# EAGLE board mmc2120mg (EAGLE 5.11)
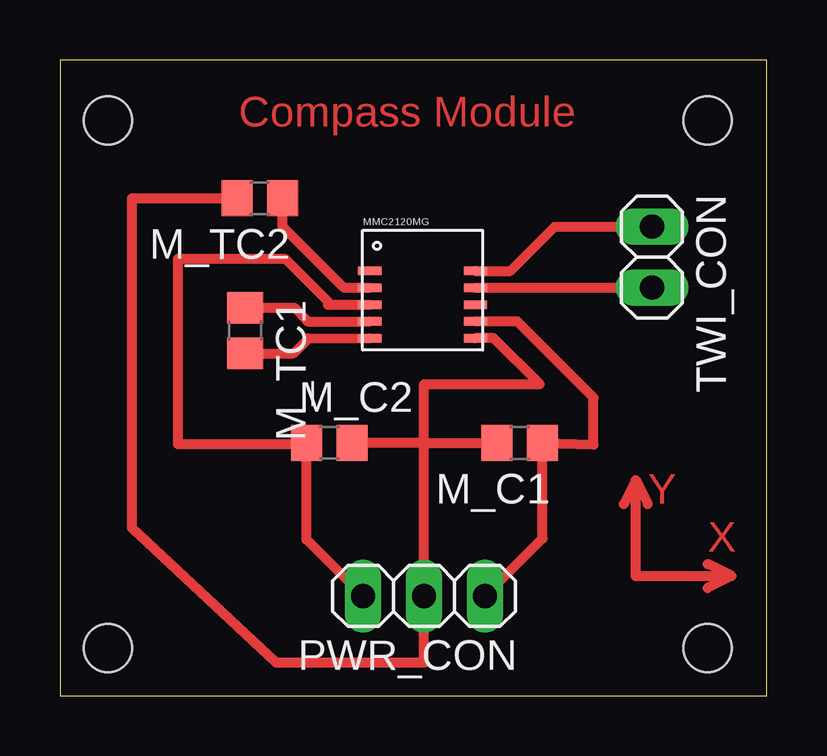
[diagram p0: board, top side]

Size 29.47 x 26.52 mm. Coordinates in mm from the lower left corner, seen from the top.
Outline: 0,0 29.47,0 29.47,26.52 0,26.52 0,0
Copper layers (1*16): Top 0.035mm / dielectric 1.5mm / Bottom 0.035mm
Design rules "default": minimum track width 10mil, minimum drill 24mil, track to track 8mil, track to pad 8mil, pad to pad 8mil, via to via 8mil, smd to smd 8mil, copper to edge 40mil, drill to drill 8mil, minimum pad ring 10mil, minimum via ring 8mil, stop-mask expansion 4mil, vias tented up to drill 0mil, thermal gap 10mil
Net classes: 0 default: width 0.406 mm, drill 1.27 mm, clearance 0.178 mm; 1 GND: width 0.406 mm, drill 1.27 mm, clearance 0.178 mm; 2 Analog: width 0.406 mm, drill 1.27 mm, clearance 0.178 mm; 3 power: width 0.406 mm, drill 1.27 mm, clearance 0.178 mm
Holes 2 mm at 2,24 27,24 27,2 2,2

## Footprints (pad centres in the part's own frame; a part is rotated, then mirrored left to right if it is on the bottom)
C0805 = smd 1.3 x 1.5: 1 -0.95,0; 2 0.95,0
LGA10 = smd 1 x 0.35: 1TEST -2,1; 2CAP -2,0.3; 3VDA -2,-0.4; 4C+ -2,-1.1; 5C- -2,-1.8; 6GND 2.4,-1.8; 7VDD 2.4,-1.1; 8FM 2.4,-0.4; 9SCL 2.4,0.3; 10SDA 2.4,1
1X03 = drill 1.016 long: 1 -2.54,0; 2 0,0; 3 2.54,0
1X02 = drill 1.016 long: 1 -1.27,0; 2 1.27,0

## Placement (x,y rotation side)
M_C1  100nF  [C0805]  19.17,10.55 180 top
M_C2  100nF  [C0805]  11.23,10.56 0 top
M_TC1  1µF  [C0805]  7.72,15.24 270 top
M_TC2  10µF  [C0805]  8.33,20.76 180 top
MMC2120MG  MMC  [LGA10]  14.92,16.72 0 top
PWR_CON  PWR_CON  [1X03]  15.18,4.17 180 top
TWI_CON  TWI_CON  [1X02]  24.68,18.3 270 top

## Library data of the parts
M_C1 M_C2 M_TC1 M_TC2 = rcl
MMC2120MG = lcc8
PWR_CON TWI_CON = pinhead

## Nets
GND [GND]: M_C1.2 M_C2.2 M_TC2.2 MMC2120MG.6GND PWR_CON.2
N$1: M_TC1.1 MMC2120MG.4C+
N$5: M_TC1.2 MMC2120MG.5C-
N$6: M_TC2.1 MMC2120MG.2CAP
SCL: MMC2120MG.9SCL TWI_CON.2
SDA: MMC2120MG.10SDA TWI_CON.1
VDA [power]: M_C2.1 MMC2120MG.3VDA PWR_CON.3
VDD [power]: M_C1.1 MMC2120MG.7VDD PWR_CON.1

## Tracks (layer width: path | path; a pad name or v marks a point on that pad's centre or on a via)
GND
  Top 0.406: 15.18,10.55 PWR_CON.2 15.18,1.4 9,1.4 3,7 3,20.76 M_TC2.2 | 15.18,10.55 M_C1.2 | M_C2.2 15.18,10.55 | MMC2120MG.6GND 18.08,14.92 20,13 15.18,13 15.18,10.55
N$1
  Top 0.406: MMC2120MG.4C+ 10.34,15.62 arc-90 10.3,15.66 9.77,16.19 M_TC1.1
N$3
  Top 0.406: 24,9 24,5 28,5 | 24,9 23.5,8 | 24,9 24.5,8 | 28,5 27,5.5 | 28,5 27,4.5
N$5
  Top 0.406: MMC2120MG.5C- 10.36,14.91 9.74,14.29 M_TC1.2
N$6
  Top 0.406: MMC2120MG.2CAP 11.85,17.02 11.85,17.01 9.28,19.58 M_TC2.1
SCL
  Top 0.406: TWI_CON.2 MMC2120MG.9SCL
SDA
  Top 0.406: MMC2120MG.10SDA 18.78,17.72 20.63,19.57 TWI_CON.1
VDA
  Top 0.406: MMC2120MG.3VDA 11.17,16.32 11.17,16.44 9.38,18.23 4.92,18.23 4.92,10.49 10.28,10.49 M_C2.1 10.28,6.53 PWR_CON.3
VDD
  Top 0.406: MMC2120MG.7VDD 19.07,15.62 22.25,12.44 22.25,10.48 M_C1.1 20.12,6.57 PWR_CON.1

## Text on the board
Top: Compass Module | Y | X